# Altium PCB LED_Driver.PcbDoc
Units mm, origin at the board's own origin, x right, y up, seen from the top; angles counter-clockwise.
Board outline 56.64 x 47.24 mm, 2 copper layers (Top Layer, Bottom Layer); 66 components, 33 nets, 189 pads, 72 vias.
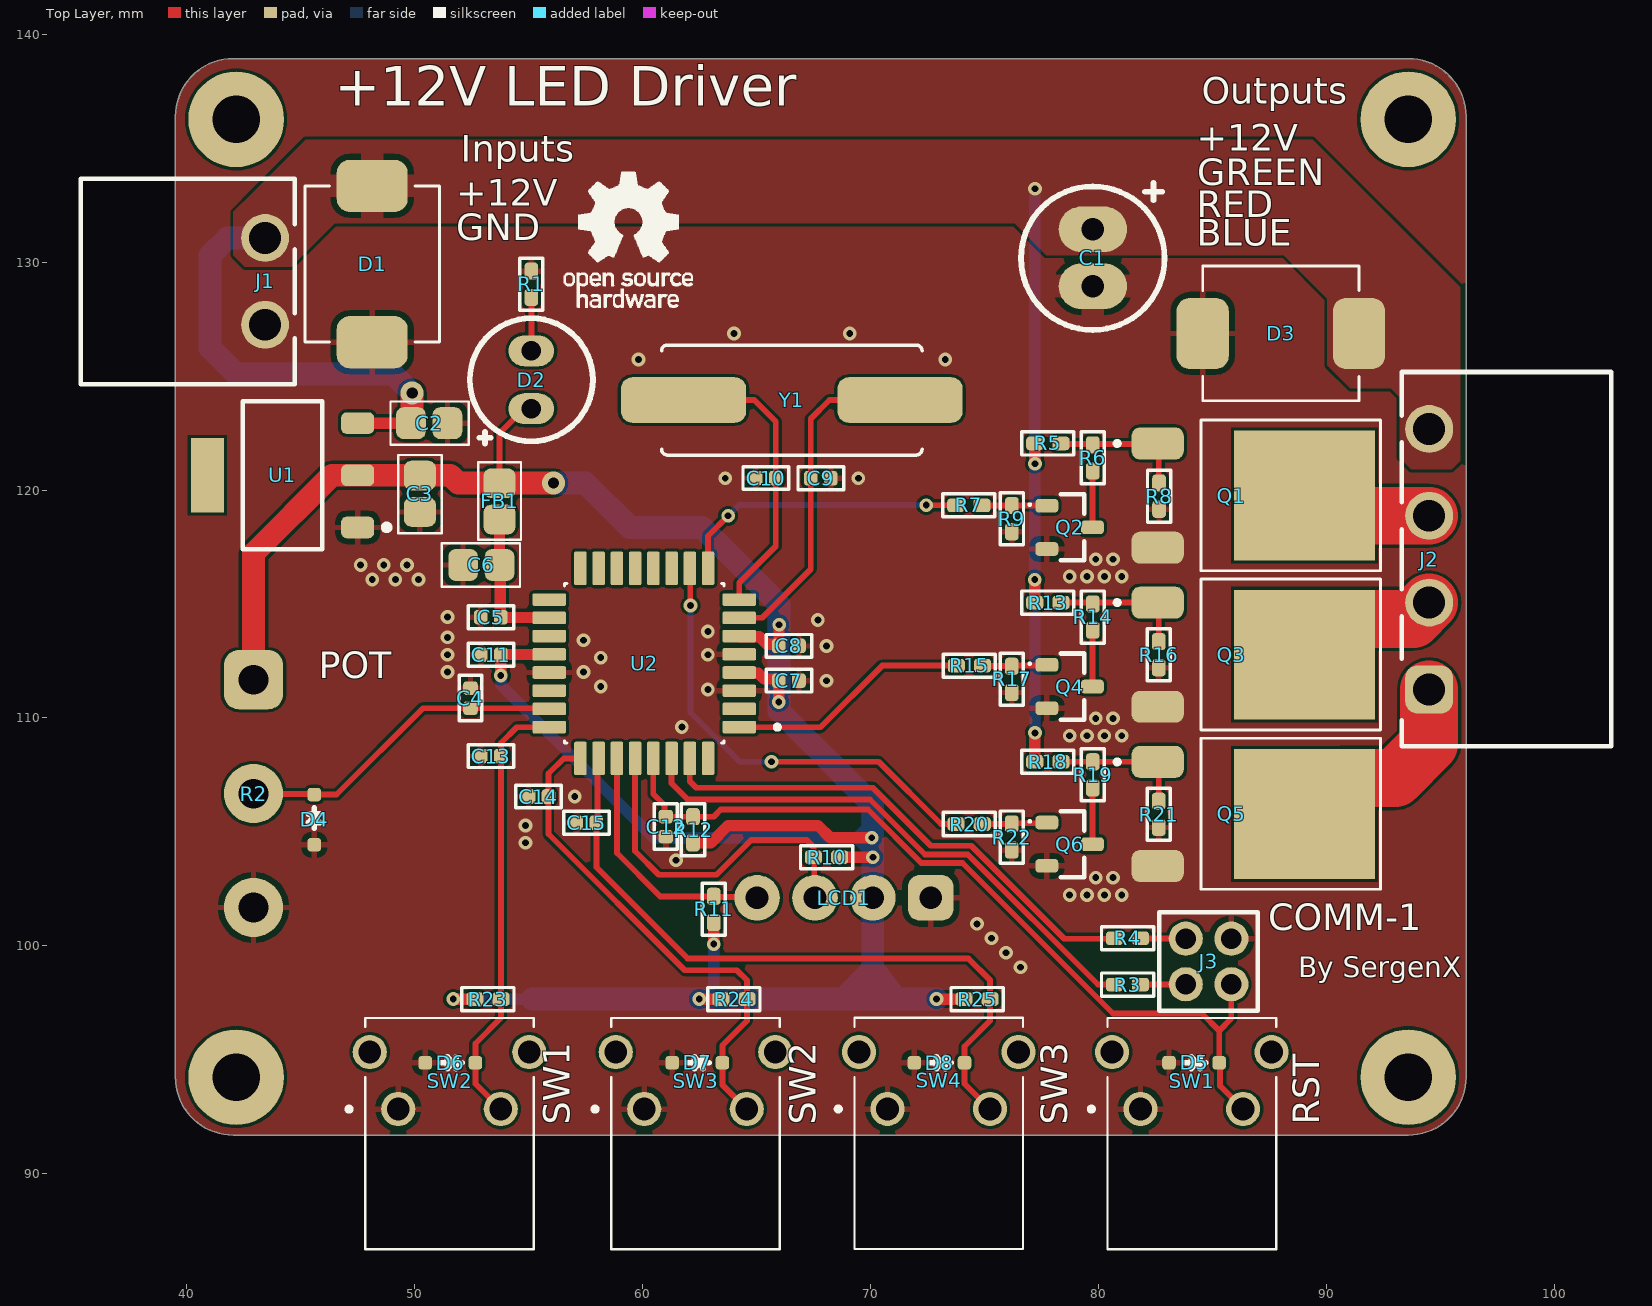
[diagram p0: Top Layer view]
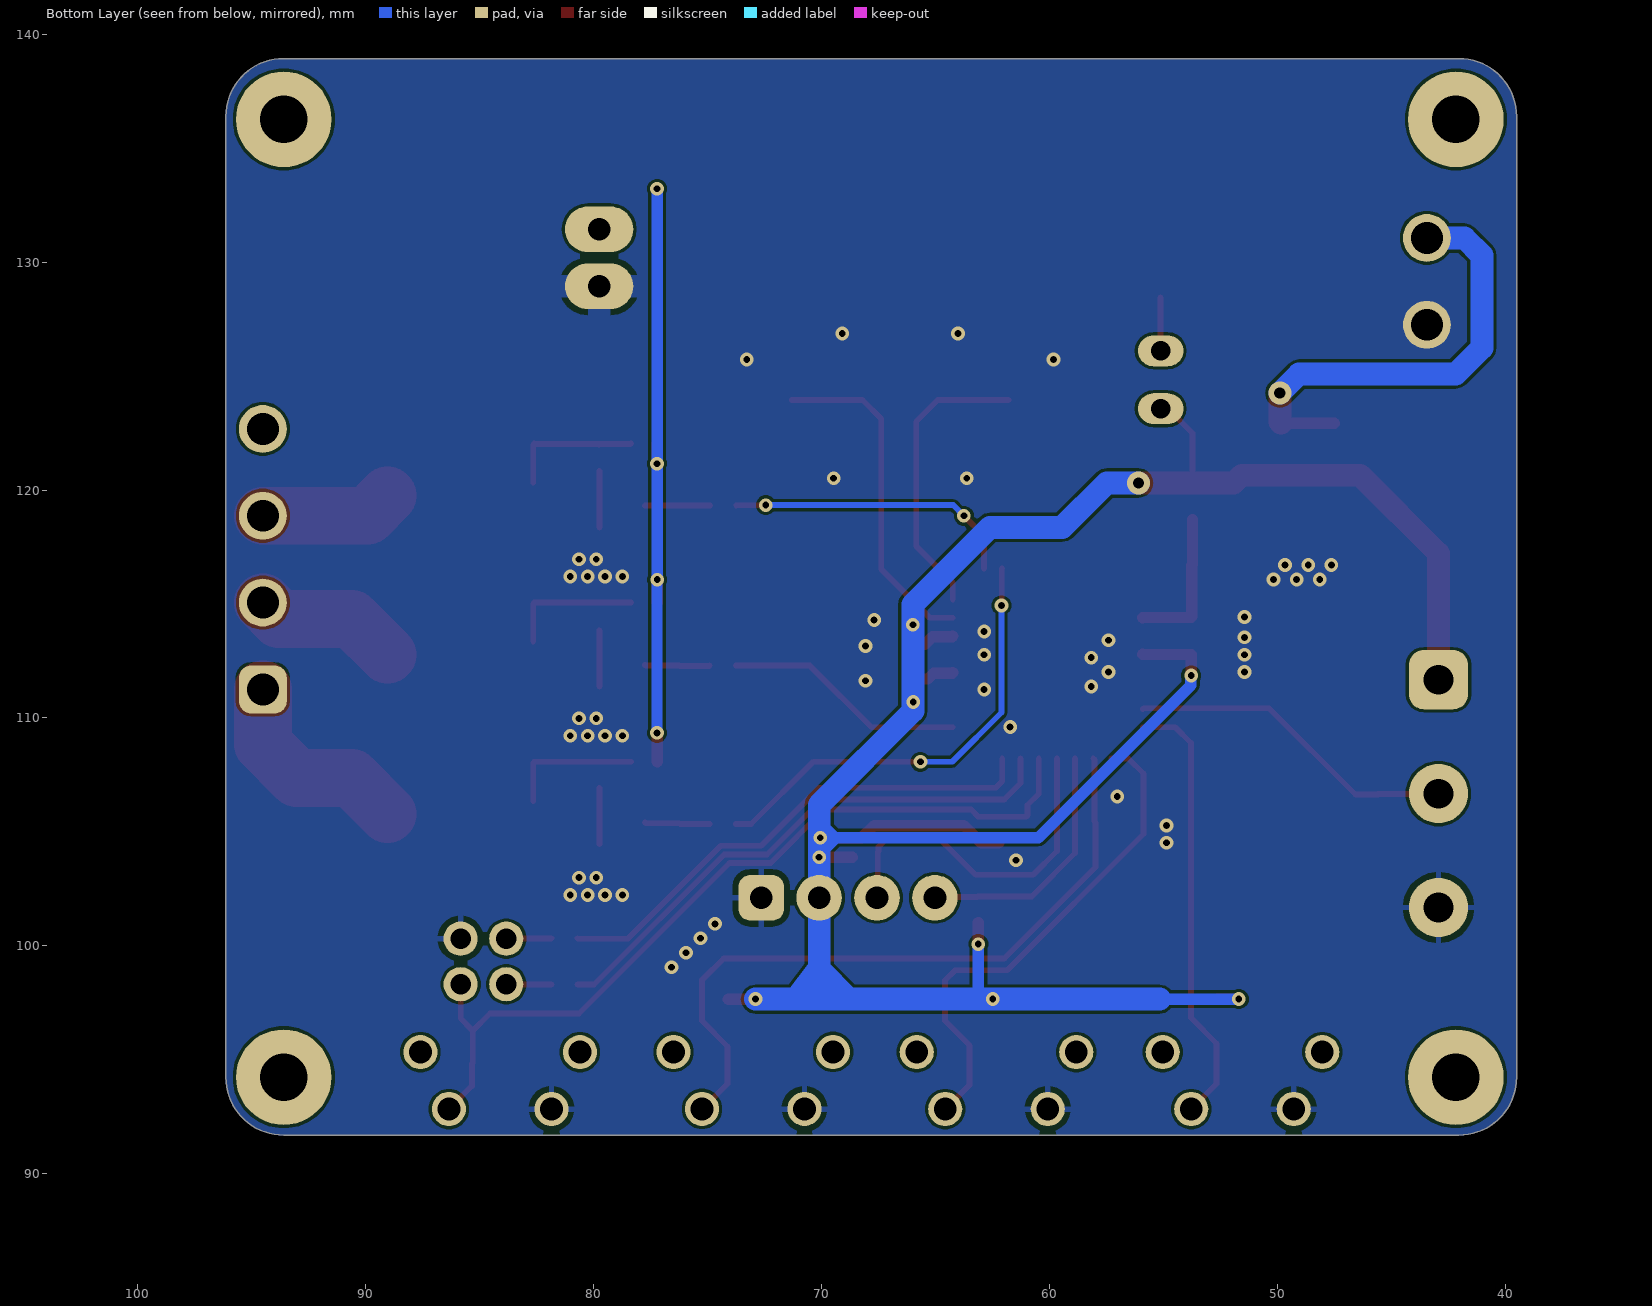
[diagram p1: Bottom Layer view, seen from below]

## Layer stack, top to bottom
Top Solder: solder mask 0.0102, Solder Resist, Dk 3.5
Top Layer: signal copper 0.0356
Dielectric 1: dielectric 0.32, FR-4, Dk 4.8
Bottom Layer: signal copper 0.0356
Bottom Solder: solder mask 0.0102, Solder Resist, Dk 3.5

## Board outline
42.037,91.694 cw(c42.037,94.234) 39.497,94.234 39.497,136.398 cw(c42.037,136.398) 42.037,138.938 93.599,138.938 cw(c93.599,136.398) 96.139,136.398 96.139,94.234 cw(c93.599,94.234) 93.599,91.694

## Design rules (kind name [scope] priority, off if disabled: settings)
Clearance [All] p1: gap=0.127 ignorepadtopadclearanceinfootprint=FALSE
DiffPairsRouting [All] p1: maxlimit=0.127 minlimit=0.127 mostfreqgap=0.127 toplayer_minwidth=0.127 toplayer_maxwidth=0.127 toplayer_prefwidth=0.127 bottomlayer_minwidth=0.127 bottomlayer_maxwidth=0.127 bottomlayer_prefwidth=0.127 impedanceprofiledriven=TRUE impedanceprofileid={3A59F56B-0B61-40A3-A006-D7EEE08681E8} impedanceprofilevalue=90.000000 maxuncoupledlength=12.7
HoleSize [All] p1: absolutevalues=TRUE maxlimit=6.3 minlimit=0.3 maxpercent=80.000 minpercent=20.000
HoleToHoleClearance [All] p1: gap=0.127 allowstackedmicrovias=TRUE
MinimumSolderMaskSliver [All] p1: minsoldermaskwidth=0.01
PlaneClearance [InNet('GND')] p1: clearance=0.508
PolygonConnect [All] p1: connectstyle=Relief reliefconductorwidth=0.254 reliefentries=4 polygonreliefangle="90 Angle" airgapwidth=0.254
RoutingVias [All] p1: holewidth=0.3 width=0.5 viastyle="Through Hole" minholewidth=0.3 minwidth=0.5 maxholewidth=6.3 maxwidth=6.3
SilkToSilkClearance [All] p1: silktosilkclearance=0.15
SilkToSolderMaskClearance [IsPad] p1: minsilkscreentomaskgap=0.01 clearancetoexposedcopper=TRUE
SolderMaskExpansion [All] p1: expansion=0.102 istentingtop=FALSE
SupplyNets "Schematic Supply Nets_4" [InNet('GND')] p1: voltage=0.000
SupplyNets "Schematic Supply Nets_2" [InNet('+12V')] p2: voltage=0.000
SupplyNets "Schematic Supply Nets" [InNet('+5V')] p3: voltage=0.000
Width [All] p1: maxlimit=6 minlimit=0.127 preferedwidth=0.127 minimp=50.000000 maximp=50.000000 favimp=50.000000
23 further rules are at their usual default settings.

## Classes and differential pairs
component class "Power - LDO": C1 C2 C3 D1 D2 J1 R1 U1
component class "MCU - Peripherals": C4 C5 C6 C7 C8 C9 C10 C11 C12 C13 C14 C15 D3 D4 D5 D6 D7 D8 FB1 J2 J3 LCD1 Q1 Q2 Q3 Q4 Q5 Q6 R2 R3 R4 R5 R6 R7 R8 R9 R10 R11 R12 R13 R14 R15 R16 R17 R18 R19 R20 R21 R22 R23 R24 R25 SW1 SW2 SW3 SW4 U2 Y1

## Components (designator, comment, footprint, x,y, rotation, side; value= is the part's Value field where it differs from the comment)
C1 "47µF" CAP_63x11x25 79.756,130.175 r270 top
C2 "1µF" 0805 50.714,122.876 r180 top
C3 "1µF" 0805 50.165,119.761 r90 top
C4 "100nF" 0402_CAP 52.451,110.871 r270 top
C5 "100nF" 0402_CAP 53.34,114.427 r0 top
C6 "10µF" 0805 52.842,116.773 r0 top
C7 "100nF" 0402_CAP 66.421,111.633 r180 top
C8 "100nF" 0402_CAP 66.421,113.157 r180 top
C9 "20pF" 0402_CAP 67.818,120.523 r0 top
C10 "20pF" 0402_CAP 65.405,120.523 r180 top
C11 "100nF" 0402_CAP 53.34,112.776 r0 top
C12 "100nF" 0402_CAP 61.007,105.231 r90 top
C13 "100nF" 0402_CAP 53.34,108.331 r0 top
C14 "100nF" 0402_CAP 55.431,106.558 r0 top
C15 "100nF" 0402_CAP 57.531,105.41 r0 top
D1 "SMDJ12CA" DIOM6859X262N 48.133,129.92 r90 top
D2 "3G4HD-G03" LED_SSL-LX4673GD-LA20 55.118,124.841 r90 top
D3 "SMDJ12CA" DIOM6859X262N 88.01,126.873 r180 top
D4 "PESD5V0S1BA,115" SOD323 45.593,105.537 r270 top
D5 "PESD5V0S1BA,115" SOD323 84.201,94.869 r180 top
D6 "PESD5V0S1BA,115" SOD323 51.562,94.869 r180 top
D7 "PESD5V0S1BA,115" SOD323 62.4,94.869 r180 top
D8 "PESD5V0S1BA,115" SOD323 73.025,94.869 r180 top
FB1 "330R @100MHz" Inductor-0805 53.721,119.507 r90 top
J1 "691322310002" WURTH_3_81_691322310002 40.005,129.159 r270 top
J2 "691322310004" 691322310004 97.917,116.967 r90 top
J3 "SAMTEC-TMM-102-03-X-D" SAMTEC-TMM-102-03-X-D 84.836,99.314 r0 top
LCD1 "LCD_0.91" 0_91-OLED 70.144,120.308 r90 top
Q1 "NCE0140K2" TO-252 89.082,119.761 r270 top
Q2 "BC817-40,215" BC81740215 78.74,118.364 r270 top
Q3 "NCE0140K2" TO-252 89.082,112.776 r270 top
Q4 "BC817-40,215" BC81740215 78.74,111.379 r270 top
Q5 "NCE0140K2" TO-252 89.082,105.786 r270 top
Q6 "BC817-40,215" BC81740215 78.74,104.46 r270 top
R1 "1k" 0402_RES 55.118,129.032 r270 top
R2 "10k" POT_ROTARY 42.926,111.68 r270 top
R3 "22R" 0402_RES 81.28,98.298 r180 top
R4 "22R" 0402_RES 81.28,100.33 r180 top
R5 "10k" 0402_RES 77.784,122.047 r180 top
R6 "1k" 0402_RES 79.756,121.412 r90 top
R7 "330R" 0402_RES 74.317,119.329 r0 top
R8 "10k" 0402_RES 82.664,119.734 r90 top
R9 "10k" 0402_RES 76.206,118.745 r90 top
R10 "10k" 0402_RES 68.072,103.886 r0 top
R11 "10k" 0402_RES 63.119,101.6 r270 top
R12 "4.7k" 0402_RES 62.212,105.093 r270 top
R13 "10k" 0402_RES 77.784,115.062 r180 top
R14 "1k" 0402_RES 79.756,114.427 r90 top
R15 "330R" 0402_RES 74.341,112.296 r0 top
R16 "10k" 0402_RES 82.652,112.778 r90 top
R17 "10k" 0402_RES 76.2,111.693 r90 top
R18 "10k" 0402_RES 77.784,108.077 r180 top
R19 "1k" 0402_RES 79.756,107.502 r90 top
R20 "330R" 0402_RES 74.33,105.345 r0 top
R21 "10k" 0402_RES 82.652,105.771 r90 top
R22 "10k" 0402_RES 76.2,104.775 r90 top
R23 "4.7k" 0402_RES 53.213,97.663 r0 top
R24 "4.7k" 0402_RES 64.008,97.663 r0 top
R25 "4.7k" 0402_RES 74.676,97.663 r0 top
SW1 "DTSA-644N-V" DTSA644NV 81.852,92.837 r0 top
SW2 "DTSA-644N-V" DTSA644NV 49.276,92.837 r0 top
SW3 "DTSA-644N-V" DTSA644NV 60.071,92.837 r0 top
SW4 "DTSA-644N-V" DTSA644NV 70.745,92.843 r0 top
U1 "AMS1117-5.0" SOT229P700X180-4N 44.069,120.65 r90 top
U2 "ATMEGA328P-AU" QFP80P900X900X120-32N 60.071,112.395 r180 top
Y1 "16MHz" HC49S 66.548,123.952 r0 top

## Footprints (in the part's own frame and the unit in brackets; to place one, negate y for a bottom-side part, rotate by r counter-clockwise, add the part's x,y. Pads: shape width x height; smd on the part's side, far side on the other; paste and mask are expansions set on the pad)
0_91-OLED [mm]
  rrect50% 2x2 hole 1: 1(-18.2,-2.5)
  round 2 hole 1: 2(-18.2,0.04) 3(-18.2,2.58) 4(-18.2,5.12)
  body extent -19.8,-4.75 18.5,7.35, height 10.51
0402_CAP [mm]
  rrect50% 0.6x0.64 smd: 1(-0.44,-0.005) 2(0.44,-0.005)
  silkscreen extent -1,-0.5 1,0.5, body extent -0.5,-0.27 0.5,0.26, height 0.52
0402_RES [mm]
  rrect50% 0.75x0.6 smd: 1(-0.575,0) 2(0.575,0)
  silkscreen extent -1.14,-0.51 1.14,0.51, body extent -0.5,-0.25 0.5,0.25, height 0.35
0805 [mm]
  rrect50% 1.3x1.4 smd: 1(-0.721,-0.06) 2(0.879,-0.06)
  silkscreen extent -1.65,-1.02 1.78,0.89, body extent -0.92,-0.7 1.08,0.58, height 1.26
691322310004 [mm] "Horizontal PCB Header, pitch 3.81mm, 04p"
  rrect50% 2.1x2.1 hole 1.4: 1(-5.715,3.4)
  round 2.1 hole 1.4: 2(-1.905,3.4) 3(1.905,3.4) 4(5.715,3.4)
  silkscreen extent -8.21,-4.6 8.22,4.6, body extent -8.21,-4.6 8.21,4.6, height 7.25
BC81740215 [mm]
  rrect50% 0.6x1 smd: 1(-0.95,-1) 2(0.95,-1) 3(0,1)
  silkscreen extent -1.45,-1.8 1.45,0.65, body extent -1.5,-1.32 1.5,1.32, height 1.08
CAP_63x11x25 [mm]
  oval 2x3 hole 1: 1(-1.27,0) 2(1.23,0)
  silkscreen extent -3.3,-3.15 3.15,3.15, body extent -3.18,-3.18 3.18,3.18, height 11.53
DIOM6859X262N [mm]
  rrect50% 2.29x3.12 smd: 1(-3.43,0) 2(3.43,0)
  silkscreen extent -3.43,-2.95 3.43,2.95, body extent -3.97,-2.95 3.97,2.95, height 2.62
DTSA644NV [mm]
  round 1.5 hole 1: 1(0,0) 2(4.5,0) 3(-1.25,2.5) 4(5.75,2.5)
  silkscreen extent -2.26,-6.15 5.95,4, body extent -1.89,-6.1 6.59,4.05, height 7.54
HC49S [mm]
  rrect50% 5.5x2 smd: 1(-4.75,0) 2(4.75,0)
  silkscreen extent -5.71,-2.41 5.71,2.41, body extent -6.75,-2.5 6.75,2.5, height 4.5
Inductor-0805 [mm]
  rrect50% 1.3x1.4 smd: 1(-0.8,0) 2(0.8,0)
  silkscreen extent -1.69,-0.95 1.71,0.94, body extent -1,-0.64 1,0.64, height 1.26
LED_SSL-LX4673GD-LA20 [mm]
  oval 1.358x2 hole 0.85: A(-1.27,0) C(1.27,0)
  silkscreen extent -2.79,-2.7 2.7,2.7, body extent -1.6,-1.9 1.9,1.9, height 6.5
POT_ROTARY [mm]
  rrect50% 2.6x2.6 hole 1.3: 1(0,0)
  round 2.6 hole 1.3: 2(5,0) 3(10,0)
  body extent -3.5,-18.4 13.5,5.8, height 23.5
QFP80P900X900X120-32N [mm]
  rrect25% 1.47x0.55 smd: 1(-4.17,2.8) 2(-4.17,2) 3(-4.17,1.2) 4(-4.17,0.4) 5(-4.17,-0.4) 6(-4.17,-1.2) 7(-4.17,-2) 8(-4.17,-2.8) 17(4.17,-2.8) 18(4.17,-2) 19(4.17,-1.2) 20(4.17,-0.4) 21(4.17,0.4) 22(4.17,1.2) 23(4.17,2) 24(4.17,2.8)
  rrect25% 0.55x1.47 smd: 9(-2.8,-4.17) 10(-2,-4.17) 11(-1.2,-4.17) 12(-0.4,-4.17) 13(0.4,-4.17) 14(1.2,-4.17) 15(2,-4.17) 16(2.8,-4.17) 25(2.8,4.17) 26(2,4.17) 27(1.2,4.17) 28(0.4,4.17) 29(-0.4,4.17) 30(-1.2,4.17) 31(-2,4.17) 32(-2.8,4.17)
  silkscreen extent -5.94,-3.5 3.5,3.5, body extent -4.5,-4.5 4.5,4.5, height 1.2
SAMTEC-TMM-102-03-X-D [mm]
  round 1.5 hole 0.89 mask+0: 1(-1,-1) 2(-1,1) 3(1,-1) 4(1,1)
  silkscreen extent -2.16,-2.16 2.16,2.16, body extent -2,-1.97 2,1.97, height 5.51
SOD323 [mm]
  rrect50% 0.6x0.6 smd: A(1.1,0) C(-1.1,0)
  silkscreen extent -0.51,-0.25 0.38,0.25, body extent -1.3,-0.67 1.3,0.67, height 1.1
SOT229P700X180-4N [mm]
  rrect50% 0.95x1.45 smd: 1(-2.29,-3.427) 2(0,-3.427) 3(2.29,-3.427)
  rect 3.25x1.45 smd: 4(0,3.173)
  silkscreen extent -3.25,-4.83 3.25,1.63, body extent -3.25,-3.63 3.25,3.37, height 1.8
TO-252 [mil]
  rrect50% 55x90 smd: 1(-90,-255) 3(90,-255)
  rect 224.02x243.31 smd: 2(0,-1.65)
  silkscreen extent -131,-329 130,130, body extent -128,-285 128,108, height 98
WURTH_3_81_691322310002 [mm]
  round 2.1 hole 1.4: 1(-1.905,3.429) 2(1.905,3.429)
  silkscreen extent -4.5,-4.67 4.5,4.73, body extent -4.41,-4.47 4.41,4.73, height 7.2

## Part data
C1: library part PKRM-050V470ME110-T2.5, "CAP.EL.47uF 50V 6.3x11 2.5MM 105C TB KOSHIN"
C2 C3: library part CC0805KKX7R9BB105, "MLCC (2012) 0805 1uF 50VDC ±10% X7R"
C4 C5 C7 C8 C11 C12 C13 C14 C15: library part CL05B104KO5NNNC, "MLCC (1005) 0402 100nF 16VDC ±10% X7R"
C6: library part GRM21BC8YA106KE11L_1, "MLCC (2012) 0805 10uF 35VDC ±10% X6S"
C9 C10: library part CL05C200JB5NNNC, "MLCC (1005) 0402 20pF 50VDC ±5% C0G (NP0)"
D1 D3: "150.8A 14.7V 12V SMC ESD and Surge Protection (TVS/ESD) ROHS", Package=None, Availability=Unavailable, MP=SMDJ36CA, Price=None
D2: "LED 3MM GREEN 20mcd 45° GREEN/DIFFUSED", Arrow Part Number=LTST-C190KRKT, Manufacturer_Name=Lite-On, Mouser Part Number=859-LTST-C190KRKT, Arrow Price/Stock=https://www.arrow.com/en/products/ltst-c190krkt/lite-on-technology?region=europe, Datasheet Link=https://componentsearchengine.com/Datasheets/1/LTST-C190KRKT.pdf, Height=0.8mm, Manufacturer_Part_Number=LTST-C190KRKT, Mouser Price/Stock=https://www.mouser.co.uk/ProductDetail/Lite-On/LTST-C190KRKT?qs=kAD5fFa1n5VY3YYNWPC1Fg%3D%3D
D4 D5 D6 D7 D8: "12A 130W 14V 5.5V Bidirectional 5V SOD-323 ESD and Surge Protection (TVS/ESD) ROHS", Arrow Part Number=LTST-C190KRKT, Manufacturer_Name=Lite-On, Mouser Part Number=859-LTST-C190KRKT, Arrow Price/Stock=https://www.arrow.com/en/products/ltst-c190krkt/lite-on-technology?region=europe, Datasheet Link=https://componentsearchengine.com/Datasheets/1/LTST-C190KRKT.pdf, Height=0.8mm, Manufacturer_Part_Number=LTST-C190KRKT, Mouser Price/Stock=https://www.mouser.co.uk/ProductDetail/Lite-On/LTST-C190KRKT?qs=kAD5fFa1n5VY3YYNWPC1Fg%3D%3D
FB1: library part LCB2012-152Y-N, "FERRITE BEAD 0603 330R/100MHZ SMD"
J1: "WURTH 3.81MM Terminal Block 691322310002"
J2: "WURTH 3.81MM Terminal Block 691322310004"
J3: "CONN HEADER VERT 4POS 2MM", Package=None, Availability=Unavailable, MP=SAMTEC-TMM-102-03-X-D, Price=None
Q1 Q3 Q5: "100V 40A 17mΩ@10V,28A 140W 3V 1 N-channel TO-252 MOSFETs ROHS", Height=2.38mm
Q2 Q4 Q6: "0.5A 45V BJT NPN Transistor SOT23 SMD", Manufacturer_Name=Nexperia, Mouser Part Number=771-BC817-40-T/R, Arrow Part Number=BC817-40,215, Arrow Price/Stock=https://www.arrow.com/en/products/bc817-40215/nexperia?region=nac, Datasheet Link=https://assets.nexperia.com/documents/data-sheet/BC817_SER.pdf, Height=1.1mm, Manufacturer_Part_Number=BC817-40,215, Mouser Price/Stock=https://www.mouser.co.uk/ProductDetail/Nexperia/BC817-40215?qs=me8TqzrmIYU%252B245p8hOLaQ%3D%3D
R1 R6 R14 R19: library part AC0402FR-071KL, "RES.(1005) 0402 1K Ohms 1% 1/16W 100PPM AEC-Q200 S"
R2: library part "Rotary Generic Potentiometer", "10k DIP"
R3 R4: library part AC0402FR-0722RL, "RES.(1005) 0402 22 Ohms 1% 1/16W AEC-Q200"
R5 R8 R9 R10 R11 R13 R16 R17 R18 R21 R22: library part AC0402FR-0710KL, "RES.(1005) 0402 10K Ohms 1% 1/16W"
R7 R15 R20: library part CRCW0402330RFKTDBC, "RES.(1005) 0402 330 Ohms 1% 1/16W 100PPM"
R12 R23 R24 R25: library part AC0402FR-074K7L, "RES.(1005) 0402 4.7K Ohms 1% 1/16W 100PPM AEC-Q200"
SW1 SW2 SW3 SW4: "Button DIP", Manufacturer_Name=Diptronics, Mouser Part Number=113-DTSA-644N-V, Datasheet Link=https://ru.mouser.com/ProductDetail/Diptronics/DTSA-644N-V?qs=gTYE2QTfZfTLDusQpQJufA%3D%3D, Height=8mm, Manufacturer_Part_Number=DTSA-644N-V, Mouser Price/Stock=https://www.mouser.co.uk/ProductDetail/Diptronics/DTSA-644N-V?qs=gTYE2QTfZfTLDusQpQJufA%3D%3D
U1: "1A LOW DROPOUT VOLTAGE REGULATOR SOT-223", Package="SOT-223 Seeed Technology", Availability="Not in stock", Check_prices=https://www.snapeda.com/parts/AMS1117/Advanced+Monolithic+Systems/view-part/?ref=eda, MF="Advanced Monolithic Systems", MP=AMS1117, Price=None, SnapEDA_Link=https://www.snapeda.com/parts/AMS1117/Advanced+Monolithic+Systems/view-part/?ref=snap
U2: "AVR AVRÂ® ATmega Microcontroller IC 8-Bit 20MHz 32KB (16K x 16) FLASH 32-TQFP (7x7)", Package="TQFP-32 Microchip", Check_prices=https://www.snapeda.com/parts/ATMEGA328P-AU/Microchip/view-part/?ref=eda, MF=Microchip, MP=ATMEGA328P-AU, SnapEDA_Link=https://www.snapeda.com/parts/ATMEGA328P-AU/Microchip/view-part/?ref=snap
Y1: library part AS49SD-16M-FE200F3, "CRYSTAL 16MHz 20pF SMD"

## Free pads (board coordinates)
  round 4.2 hole 2.1: EARTH(42.164,94.234) EARTH(42.164,136.271) EARTH(93.599,94.234) EARTH(93.599,136.271)

## Via types
v1: diameter 0.6, hole 0.3, Top Layer to Bottom Layer, tented both sides, 70 vias
v2: diameter 1, hole 0.5, Top Layer to Bottom Layer, tented both sides, 2 vias

## Nets (pads, with @x,y where several pads share a name; then routed paths per layer and width w, separated by ;. In a path a pad name is that pad's centre, name@x,y a point inside that pad or via, vN(x,y) a via of type N, cw(c..) or ccw(c..) an arc to the next point about the centre after c; other vN are vias at no path point)
+5V: C3.2 C7.2 C8.2 C11.2 D2.A FB1.2 LCD1.2 R2.1 R10.2 R11.2 R12.2 R23.1 R24.1 R25.1 U1.2 U2.4 U2.6 U2.20 | length 121.3
  Top Layer w0.254: FB1.2 53.721,122.495 54.797,123.571 D2.A
  Top Layer w0.5: v1(51.689,97.663) R23.1 ; v1(53.778,111.863) 53.779,111.865 C11.2 C11.2 53.792,112.783 55.889,112.783 U2.20 ; R12.2 62.989,104.518 63.747,105.276 67.698,105.276 68.23,104.744 v1(70.058,104.744) ; v1(62.484,97.663) R24.1 ; v1(63.119,100.076) R11.2 ; U2.4 64.266,111.97 65.068,111.97 65.33,111.708 65.931,111.708 65.981,111.658 C7.2 C7.2@65.986,111.633 ; U2.6 64.266,113.57 65.119,113.57 65.457,113.232 65.931,113.232 65.981,113.182 C8.2@65.981,113.171 ; C8.2@65.976,113.167 C8.2@65.981,113.171 ; v1@65.981,110.708 C7.2@65.981,111.628 ; C8.2 C8.2@65.981,113.171 ; C8.2@65.986,113.167 C8.2@65.986,113.176 ; v1@65.986,114.086 C8.2@65.986,113.176 ; R10.2 v1(70.104,103.886) ; v1(72.898,97.663) R25.1 ; C8.2@65.981,113.171 C8.2@65.986,113.176
  Top Layer w1: R2.1 42.926,117.221 46.355,120.65 U1.2 51.562,120.65 51.905,120.307 FB1.2 56.083,120.307 v2(56.089,120.313)
  Bottom Layer w0.5: v1(51.689,97.663) 55.161,97.663 ; v1(53.778,111.863) 53.797,111.844 53.797,111.43 60.483,104.744 v1(70.058,104.744) ; 62.992,97.663 63.119,97.79 v1(63.119,100.076)
  Bottom Layer w1: 55.161,97.663 62.992,97.663 70.104,97.663 ; v2(56.089,120.313) 57.487,120.313 59.436,118.364 62.611,118.364 65.991,114.984 65.991,110.976 65.99,110.3 70.104,106.187 v1@70.104,104.698 ; v1(70.058,104.744) v1@70.104,104.698 ; v1(72.898,97.663) 70.104,97.663 ; 70.104,97.663 LCD1.2 v1(70.104,103.886) v1@70.104,104.698
  other v1: 65.975,110.703 65.991,114.091
+12V: C1.1 C2.2 D1.2 D3.1 J1.1 J2.4 R5.2 R13.2 R18.2 U1.3 | length 47.2
  Top Layer w0.5: R18.2 77.213,108.081 77.213,109.341 v1(77.218,109.345) ; R13.2 77.209,116.071 v1@77.216,116.078 ; R5.2@77.21,122.048 R5.2 77.212,122.043 77.212,121.162 v1(77.216,121.158)
  Top Layer w0.508: U1.3 47.498,122.938 49.833,122.938 C2.2
  Top Layer w1: C2.2 49.885,122.986 v2(49.885,124.26)
  Bottom Layer w0.5: v1@77.216,109.347 77.218,109.349 77.218,116.069 77.213,116.074 77.213,121.155 v1(77.216,121.158) v1(77.216,133.223)
  Bottom Layer w1: J1.1 41.783,131.064 41.021,130.302 41.021,126.238 42.164,125.095 49.05,125.095 v2(49.885,124.26)
  other v1: 77.211,116.069
BLUE_PWM: R20.1 U2.10 | length 20
  Top Layer w0.254: U2.10 62.087,116.549 62.087,114.951 v1(62.103,114.935) ; v1(65.659,108.077) 70.358,108.077 73.09,105.345 R20.1
  Bottom Layer w0.254: v1(62.103,114.935) 62.103,110.236 64.262,108.077 v1(65.659,108.077)
BTN_1: C13.2 D6.C R23.2 SW2.2 U2.24 | length 19.4
  Top Layer w0.254: SW2.2 52.662,93.951 D6.C 52.662,95.715 53.788,96.841 R23.2 ; R23.2@53.78,97.663 C13.2 53.78,108.898 54.477,109.595 U2.24 ; R23.2@54.036,97.657 R23.2@54.042,97.663 ; SW2.2@54.157,92.837 SW2.2@54.163,92.843
BTN_2: C14.2 D7.C R24.2 SW3.2 U2.25 | length 22.2
  Top Layer w0.254: U2.25 56.536,108.225 55.871,107.56 C14.2 55.871,104.911 61.849,98.933 64.135,98.933 64.583,98.485 R24.2 64.583,96.714 63.5,95.631 D7.C 63.5,93.908 SW3.2 SW3.2@64.577,92.843
BTN_3: C15.2 D8.C R25.2 SW4.2 U2.26 | length 30.7
  Top Layer w0.254: U2.26 58.021,108.175 58.021,105.455 C15.2 57.971,103.446 61.976,99.441 74.295,99.441 75.251,98.485 R25.2 75.245,97.657 75.245,96.708 74.125,95.588 D8.C 74.125,93.951 75.239,92.837 SW4.2
GND: C1.2 C2.1 C3.1 C4.1 C5.1 C6.1 C7.1 C8.1 C9.2 C10.2 C11.1 C12.1 C13.1 C14.1 C15.1 D1.1 D3.2 D4.A D5.A D6.A D7.A D8.A J1.2 J3.4 LCD1.1 Q1.3 Q2.2 Q3.3 Q4.2 Q5.3 Q6.2 R1.1 R2.3 R8.1 R9.1 R16.1 R17.1 R21.1 R22.1 SW1.1 SW2.1 SW3.1 SW4.1 U1.1 U2.3 U2.5 U2.21
  other v1: 76.581,99.06 75.946,99.695 75.311,100.33 74.676,100.965 78.74,102.23 79.502,102.23 80.264,102.23 81.026,102.23 79.883,102.992 80.645,102.992 61.468,103.759 54.864,104.521 54.864,105.283 57.023,106.553 78.74,109.22 79.502,109.22 80.264,109.22 81.026,109.22 61.722,109.601 79.883,109.982 80.645,109.982 62.865,111.252 58.166,111.379 68.072,111.633 51.435,112.014 57.404,112.014 58.166,112.649 51.435,112.776 62.865,112.776 68.072,113.157 57.404,113.411 51.435,113.538 62.865,113.792 67.691,114.3 51.435,114.427 48.133,116.078 49.149,116.078 50.165,116.078 78.74,116.205 79.502,116.205 80.264,116.205 81.026,116.205 47.625,116.713 48.641,116.713 49.657,116.713 79.883,116.967 80.645,116.967 63.627,120.523 69.469,120.523 59.817,125.73 73.279,125.73 64.008,126.873 69.088,126.873
GREEN_PWM: R7.1 U2.9 | length 12.9
  Top Layer w0.254: U2.9 62.871,117.989 v1(63.754,118.872) ; v1(72.445,119.341) 72.451,119.335 73.736,119.335 R7.1
  Bottom Layer w0.254: v1(63.754,118.872) 64.223,119.341 v1(72.445,119.341)
I2C_SCL: LCD1.3 R10.1 U2.28 | length 15.3
  Top Layer w0.254: U2.28 59.671,104.159 60.706,103.124 63.246,103.124 64.77,104.648 67.199,104.648 67.497,104.35 67.497,104.14 67.53,104.106 67.53,102.142 LCD1.3
I2C_SDA: LCD1.4 R11.1 U2.27 | length 11.1
  Top Layer w0.254: U2.27 58.871,104.07 60.773,102.168 63.112,102.168 R11.1 63.153,102.142 64.99,102.142 LCD1.4
NetC5_2: C5.2 C6.2 FB1.1 U2.18 | length 6.4
  Top Layer w0.5: FB1.1 C6.2 53.751,116.683 53.751,114.452 C5.2 53.794,114.409 55.887,114.409 U2.18
NetC9_1: C9.1 U2.7 Y1.2 | length 14.9
  Top Layer w0.254: U2.7 65.246,114.395 67.378,116.527 C9.1 67.378,123.131 68.199,123.952 Y1.2
NetC10_1: C10.1 U2.8 Y1.1 | length 12.9
  Top Layer w0.254: Y1.1 64.897,123.952 65.845,123.004 C10.1 65.845,117.534 64.241,115.93 U2.8
NetD2_C: D2.C R1.2 | length 2.3
  Top Layer w0.254: D2.C R1.2
NetJ2_1: J2.1 Q5.2 | length 9.1
  Top Layer w2.54: Q5.2 90.615,107.361 93.029,107.361 94.517,108.849 J2.1
NetJ2_2: J2.2 Q3.2 | length 6.4
  Top Layer w2.54: Q3.2 90.615,114.351 93.806,114.351 J2.2
NetJ2_3: J2.3 Q1.2 | length 5.8
  Top Layer w2.54: Q1.2 89.929,118.872 J2.3
NetJ3_1: J3.1 R3.1 | length 2
  Top Layer w0.254: R3.1 81.863,98.306 83.828,98.306 J3.1
NetJ3_2: J3.2 R4.1 | length 2
  Top Layer w0.254: R4.1 81.863,100.322 83.828,100.322 J3.2
NetQ1_1: Q1.1 R5.1 R6.2 R8.2 | length 6
  Top Layer w0.254: R5.1 78.389,122.017 79.726,122.017 R6.2 79.786,122.017 82.575,122.017 Q1.1 82.65,122.002 R8.2@82.65,120.323
NetQ2_1: Q2.1 R7.2 R9.2 | length 2.9
  Top Layer w0.254: R7.2 74.899,119.321 77.733,119.321 Q2.1
NetQ2_3: Q2.3 R6.1 | length 2.5
  Top Layer w0.254: Q2.3 79.748,118.372 79.748,120.829 R6.1
NetQ3_1: Q3.1 R13.1 R14.2 R16.2 | length 6
  Top Layer w0.254: R13.1 Q3.1 82.652,115.015 R16.2
NetQ4_1: Q4.1 R15.2 R17.2 | length 2.9
  Top Layer w0.254: R15.2 74.93,112.282 76.186,112.282 R17.2 76.231,112.299 77.709,112.299 Q4.1
NetQ4_3: Q4.3 R14.1 | length 2.5
  Top Layer w0.254: Q4.3 79.748,111.387 79.748,113.844 R14.1
NetQ5_1: Q5.1 R18.1 R19.2 R21.2 | length 6
  Top Layer w0.254: R18.1 R19.2 79.758,108.075 82.603,108.075 Q5.1 82.652,108.025 R21.2
NetQ6_1: Q6.1 R20.2 R22.2 | length 2.9
  Top Layer w0.254: R20.2 74.907,105.348 76.198,105.348 R22.2 76.23,105.38 77.71,105.38 Q6.1
NetQ6_3: Q6.3 R19.1 | length 2.5
  Top Layer w0.254: Q6.3 79.748,104.468 79.748,106.919 R19.1
nRESET: C12.2 D5.C J3.3 R12.1 SW1.2 U2.29 | length 37.4
  Top Layer w0.254: U2.29 60.471,106.661 60.955,106.177 60.955,105.721 61.012,105.664 R12.1@62.212,105.664 ; R12.1 63.123,105.668 63.432,105.977 69.887,105.977 72.232,103.632 74.041,103.632 80.645,97.028 84.55,97.028 85.301,96.277 ; J3.3 85.836,96.812 85.301,96.277 ; SW1.2 85.344,93.845 85.344,94.826 D5.C 85.301,96.277
POT_ADC: C4.2 D4.C R2.2 U2.23 | length 14.6
  Top Layer w0.254: R2.2 42.947,106.659 45.571,106.659 D4.C 46.566,106.637 50.36,110.431 C4.2 53.335,110.431 55.865,110.431 U2.23
RED_PWM: R15.1 U2.1 | length 10.6
  Top Layer w0.254: U2.1 67.812,109.595 70.513,112.296 R15.1
RXD: R3.2 U2.30 | length 24.2
  Top Layer w0.254: U2.30 61.271,107.131 61.976,106.426 69.977,106.426 72.39,104.013 74.264,104.013 79.979,98.298 R3.2
TXD: R4.2 U2.31 | length 22.5
  Top Layer w0.254: U2.31 62.071,107.22 62.357,106.934 70.104,106.934 72.644,104.394 74.422,104.394 78.502,100.314 80.689,100.314 R4.2
pads on no net: SW1.3 SW1.4 SW2.3 SW2.4 SW3.3 SW3.4 SW4.3 SW4.4 U1.4 U2.2 U2.11 U2.12 U2.13 U2.14 U2.15 U2.16 U2.17 U2.19 U2.22 U2.32

## Polygon pours and split planes (outlines as drawn)
+12V on Top Layer "NONET_L01_P-001" (solid, pour order 0): 42.926,133.096 42.037,132.207 42.037,130.302 42.545,129.794 44.577,129.794 46.482,131.699 76.327,131.699 77.724,130.302 88.138,130.302 90.043,128.397 90.043,125.476 91.059,124.46 92.837,124.46 93.218,124.079 93.218,121.412 93.726,120.904 95.504,120.904 95.885,121.285 95.885,128.905 89.408,135.382 45.212,135.382
GND on Top Layer "GND_L01_P001" (solid, remove dead copper, pour order 1): 42.037,91.694 cw(c42.037,94.234) 39.497,94.234 39.497,136.398 cw(c42.037,136.398) 42.037,138.938 93.599,138.938 cw(c93.599,136.398) 96.139,136.398 96.139,94.234 cw(c93.599,94.234) 93.599,91.694
GND on Bottom Layer "GND_L02_P002" (solid, remove dead copper, pour order 2): 42.037,91.694 cw(c42.037,94.234) 39.497,94.234 39.497,136.398 cw(c42.037,136.398) 42.037,138.938 93.599,138.938 cw(c93.599,136.398) 96.139,136.398 96.139,94.234 cw(c93.599,94.234) 93.599,91.694

## Silkscreen, mask and mechanical layers (free items; w line width, h text height)
Top Overlay:
  drawing of 18 lines, arcs and shapes, not listed
  text "Outputs" at 84.53,136.561 h2
  text "+12V LED Driver" at 46.482,136.296 h3
  text "+12V" at 84.328,134.493 h2
  text "Inputs" at 52.018,134.021 h2
  text "GREEN" at 84.33,132.986 h2
  text "+12V" at 51.816,132.08 h2
  text "RED" at 84.328,131.572 h2
  text "GND" at 51.818,130.573 h2
  text "BLUE" at 84.328,130.319 h2
  text "POT" at 45.793,111.342 h2
  text "COMM-1" at 87.449,100.293 h2
  text "By SergenX" at 88.773,98.313 h1.52
  text "SW1" at 57.187,92.15 h2 r90
  text "SW2" at 67.982,92.15 h2 r90
  text "SW3" at 79.031,92.15 h2 r90
  text "RST" at 90.08,92.148 h2 r90
Mechanical 1:
  the board outline again, w0.254
  text "NOTES" at 106.045,138.049 h3
  text "Connectors is Protected with TVS" at 106.045,135.763 h1.52
  text "GERBER , PICK&PLACE and BOM files available in the PCB folders" at 106.045,130.81 h1.52

## Dimensions
93.599,138.938 to 93.599,91.694 on Mechanical 1
39.497,136.398 to 96.139,136.398 on Mechanical 1